# Allegro board final_1040_board.brd
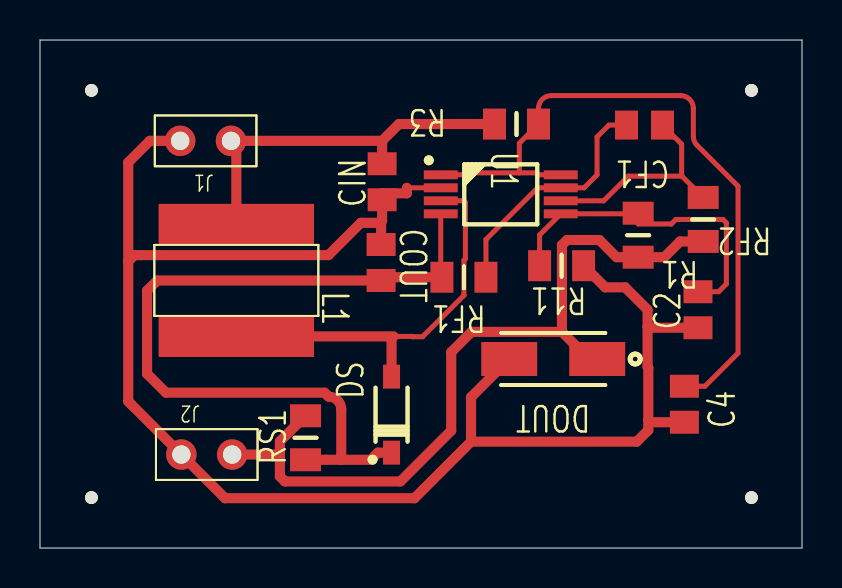
[diagram p0: board, top side]
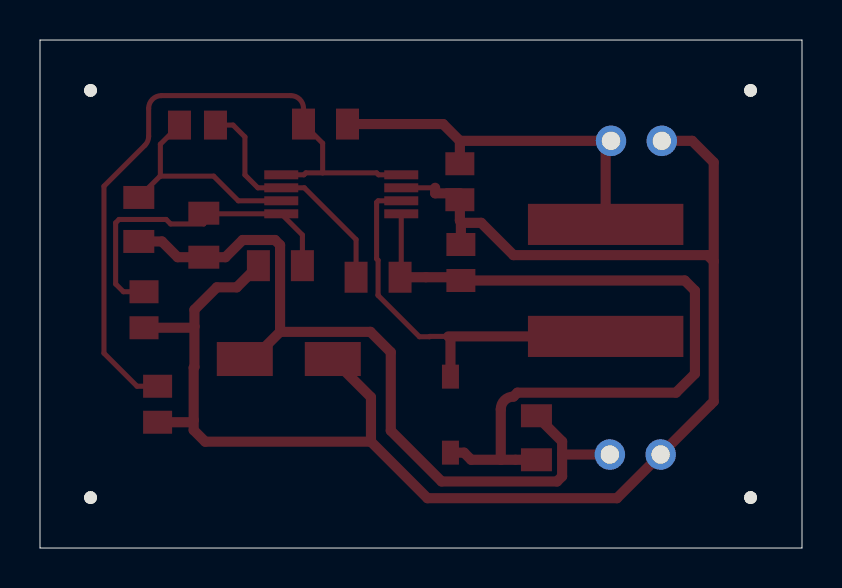
[diagram p1: board, bottom side, seen from below]

Outline 38.1 x 25.4 mm; copper layers: TOP, BOTTOM. Coordinates in mm from the lower left corner of the outline.
Outline path: 0,25.4 38.1,25.4 38.1,0 0,0 0,25.4

## Design rules (mm)
nets with their own width: min track width 0.508; nets GND_POWER N00099 N00498

## Placement (name value [footprint] x y rotation side)
C2  1nF  [CAPC2013X145AN]  32.9 11.91 90 top
C4  1nF  [CAPC2013X145AN]  32.22 7.19 90 top
CF1  1u  [CAPC2013X145AN]  30.23 21.15 180 top
CIN  4.7uF  [CAPC2013X145AN]  17.11 18.31 90 top
COUT  10uF  [CAPC2013X145AN]  17.06 14.27 270 top
DOUT  SMM4F5.0  [DIOM5226X203M]  25.66 9.45 180 top
DS  STPS0560Z  [SOD3716X135M]  17.58 6.67 90 top
J1  CON2  [JUMPER2]  9.55 20.36 180 top
J2  CON2  [JUMPER2]  9.61 4.67 180 top
L1  10uH  [INDUCTOR_NRS8030]  9.82 13.38 270 top
NOREF  -  [unnamed]  35.57 2.52 0 top
NOREF#2  -  [unnamed]  2.57 22.88 0 top
NOREF#3  -  [unnamed]  35.57 22.88 0 top
NOREF#4  -  [unnamed]  2.57 2.52 0 top
R1  390k  [RESC2013X38M]  29.91 15.64 270 top
R3  1k  [RESC2013X38M]  23.83 21.2 180 top
R11  130k  [RESC2013X38M]  26.08 14.12 180 top
RF1  1k  [RESC2013X38M]  21.2 13.54 180 top
RF2  1k  [RESC2013X38M]  33.16 16.43 270 top
RS1  180m  [RESC2013X38M]  13.28 5.51 90 top
U1  spv1040  [SOP65P640X120-8M]  23.04 17.68 0 top

## Library data of the parts
C2 C4 CF1 CIN COUT = C
DOUT DS = mmsz5221_1.bt1
J1 J2 = CON2: User Part Number: ***
L1 = L
R1 R3 R11 RF1 RF2 RS1 = R
U1 = SPV1040

## Footprints (pads in the part's own frame, mm; a bottom-side part is the same pattern mirrored in y, then rotated)
CAPC2013X145AN
  rect 1.15x1.45 smd: 1(-0.9,0) 2(0.9,0)
DIOM5226X203M
  rect 2.8x1.7 smd: A(2.2,0) C(-2.2,0)
INDUCTOR_NRS8030
  rect 2.057x7.772 smd: 1(-2.8,0) 2(2.8,0)
JUMPER2
  round 1.524 hole 0.914: 1(0,0) 2(2.54,0)
RESC2013X38M
  rect 1.15x1.55 smd: 1(-1.1,0) 2(1.1,0)
SOD3716X135M
  rect 1.2x0.85 smd: A(1.9,0) C(-1.9,0)
SOP65P640X120-8M
  rect 1.7x0.45 smd: 1(-3,0.975) 2(-3,0.325) 3(-3,-0.325) 4(-3,-0.975) 5(3,-0.975) 6(3,-0.325) 7(3,0.325) 8(3,0.975)
unnamed
  round 0.635 hole 3.175 unplated: (0,0)

## Nets
GND_POWER: C2.1 C4.1 CIN.1 COUT.1 DOUT.A J1.2 J2.2 R11.1 U1.2(GND)
N00099: CIN.2 J1.1 L1.1 R3.2
N00268: DS.A L1.2 U1.3(LX)
N00274: C4.2 R3.1 U1.1(MPP_SET) U1.8(XSHUT)
N00467: CF1.2 RF1.1 U1.7(ICTRL_PLUS)
N00476: CF1.1 RF2.1 U1.6(ICTRL_MINUS)
N00498: DOUT.C J2.1 R1.2 RF2.2 RS1.2
N00508: COUT.2 DS.C RF1.2 RS1.1 U1.4(VOUT)
N00553: C2.2 R1.1 R11.2 U1.5(VCTRL)

## Routing (per net, layer and track width the routed paths; a pad name or vN(x,y) marks a point on that pad's centre or on a via; arc(x,y) is an arc through that point)
GND_POWER: length 83.1
  TOP w0.254: 18.34,18.01 U1.2
  TOP w0.508: 4.41,14.33 4.72,14.64 14.42,14.64 16.04,16.26 17.06,16.26 ; 4.41,14.33 4.41,19.28 5.49,20.36 J1.2 ; 4.41,14.33 4.41,7.33 J2.2 9.25,2.49 18.72,2.49 21.55,5.32 ; C4.1 30.52,6.29 30.42,6.39 ; 30.42,6.39 30.42,5.89 29.84,5.32 21.55,5.32 ; 30.42,6.39 30.42,9.01 30.38,9.05 30.38,11.07 ; R11.1 28.26,13.03 29.26,13.03 30.38,11.91 30.38,11.07 ; 17.06,16.26 17.06,16.33 17.11,16.38 CIN.1 17.11,17.73 18.34,17.73 18.34,18.01 ; 17.06,16.26 COUT.1 ; DOUT.A 21.55,7.54 21.55,5.32 ; 30.38,11.07 30.44,11.01 C2.1
N00099: length 19
  TOP w0.508: R3.2 17.95,21.2 17.11,20.36 ; 17.11,20.36 CIN.2 ; 17.11,20.36 J1.1 9.82,20.09 L1.1
N00268: length 20.2
  TOP w0.254: U1.3 21.19,17.36 21.27,17.28 21.27,14.46 21.2,14.39 21.2,12.63 19.13,10.56 18.62,10.56 18.61,10.58 17.68,10.58 17.58,10.47
  TOP w0.508: 17.58,10.47 DS.A ; 17.68,10.58 L1.2
N00274: length 34.7
  TOP w0.254: C4.2 33.25,8.09 34.9,9.74 34.9,18.09 32.85,20.14 arc(32.72,20.34) 32.67,20.59 32.67,21.98 arc(32.48,22.43) 32.03,22.62 25.56,22.62 arc(25.11,22.43) 24.93,21.98 R3.1 23.97,20.24 23.97,18.76 ; 23.97,18.76 24.81,18.76 24.9,18.66 U1.8 ; 23.97,18.76 21.27,18.76 21.17,18.66 U1.1
N00467: length 12.4
  TOP w0.254: RF1.1 22.3,15.42 24.88,18.01 U1.7 27.21,18.01 27.85,18.66 27.85,20.55 28.45,21.15 CF1.2
N00476: length 11
  TOP w0.254: 32.08,18.59 32.08,20.19 CF1.1 ; 32.08,18.59 32.09,18.59 RF2.1 ; 32.08,18.59 29.42,18.59 28.18,17.36 U1.6
N00498: length 40.1
  TOP w0.508: J2.1 11.99,4.67 ; 11.99,4.67 11.99,5.33 RS1.2 ; 11.99,4.67 11.99,3.58 12.25,3.33 18.02,3.33 20.56,5.87 20.56,9.79 21.58,10.81 26.1,10.81 ; DOUT.C 27.45,9.45 26.1,10.81 ; 26.1,10.81 26.1,15.15 26.35,15.4 27.97,15.4 28.83,14.54 R1.2 31.22,14.54 32,15.33 RF2.2
N00508: length 39.9
  TOP w0.254: U1.4 20.04,13.6 RF1.2
  TOP w0.508: 15.05,4.41 RS1.1 ; 15.05,4.41 15.06,4.42 15.06,6.93 arc(14.88,7.38) 14.43,7.57 14.23,7.77 6.3,7.77 5.35,8.71 5.35,12.87 5.86,13.37 COUT.2 17.22,13.54 RF1.2 ; 15.05,4.41 16.54,4.41 16.9,4.77 DS.C
N00553: length 16.7
  TOP w0.254: 29.91,16.71 U1.5 24.98,15.65 R11.2 ; 29.91,16.71 R1.1 ; 29.91,16.71 29.91,16.2 31.57,16.2 31.79,16.43 34.15,16.43 34.32,16.26 34.32,13.2 33.93,12.81 C2.2

## Text on the board
User.Comments: MOXIE DEVICES
